# Altium PCB 01DriverOccure&SignalDetect.PcbDoc (part 2 of 3)
Units mil, origin at the board's own origin, x right, y up, seen from the top; angles counter-clockwise.
Board outline 5526.23 x 3781.16 mil, 2 copper layers (Top Layer, Bottom Layer); 144 components, 81 nets, 385 pads, 179 vias.
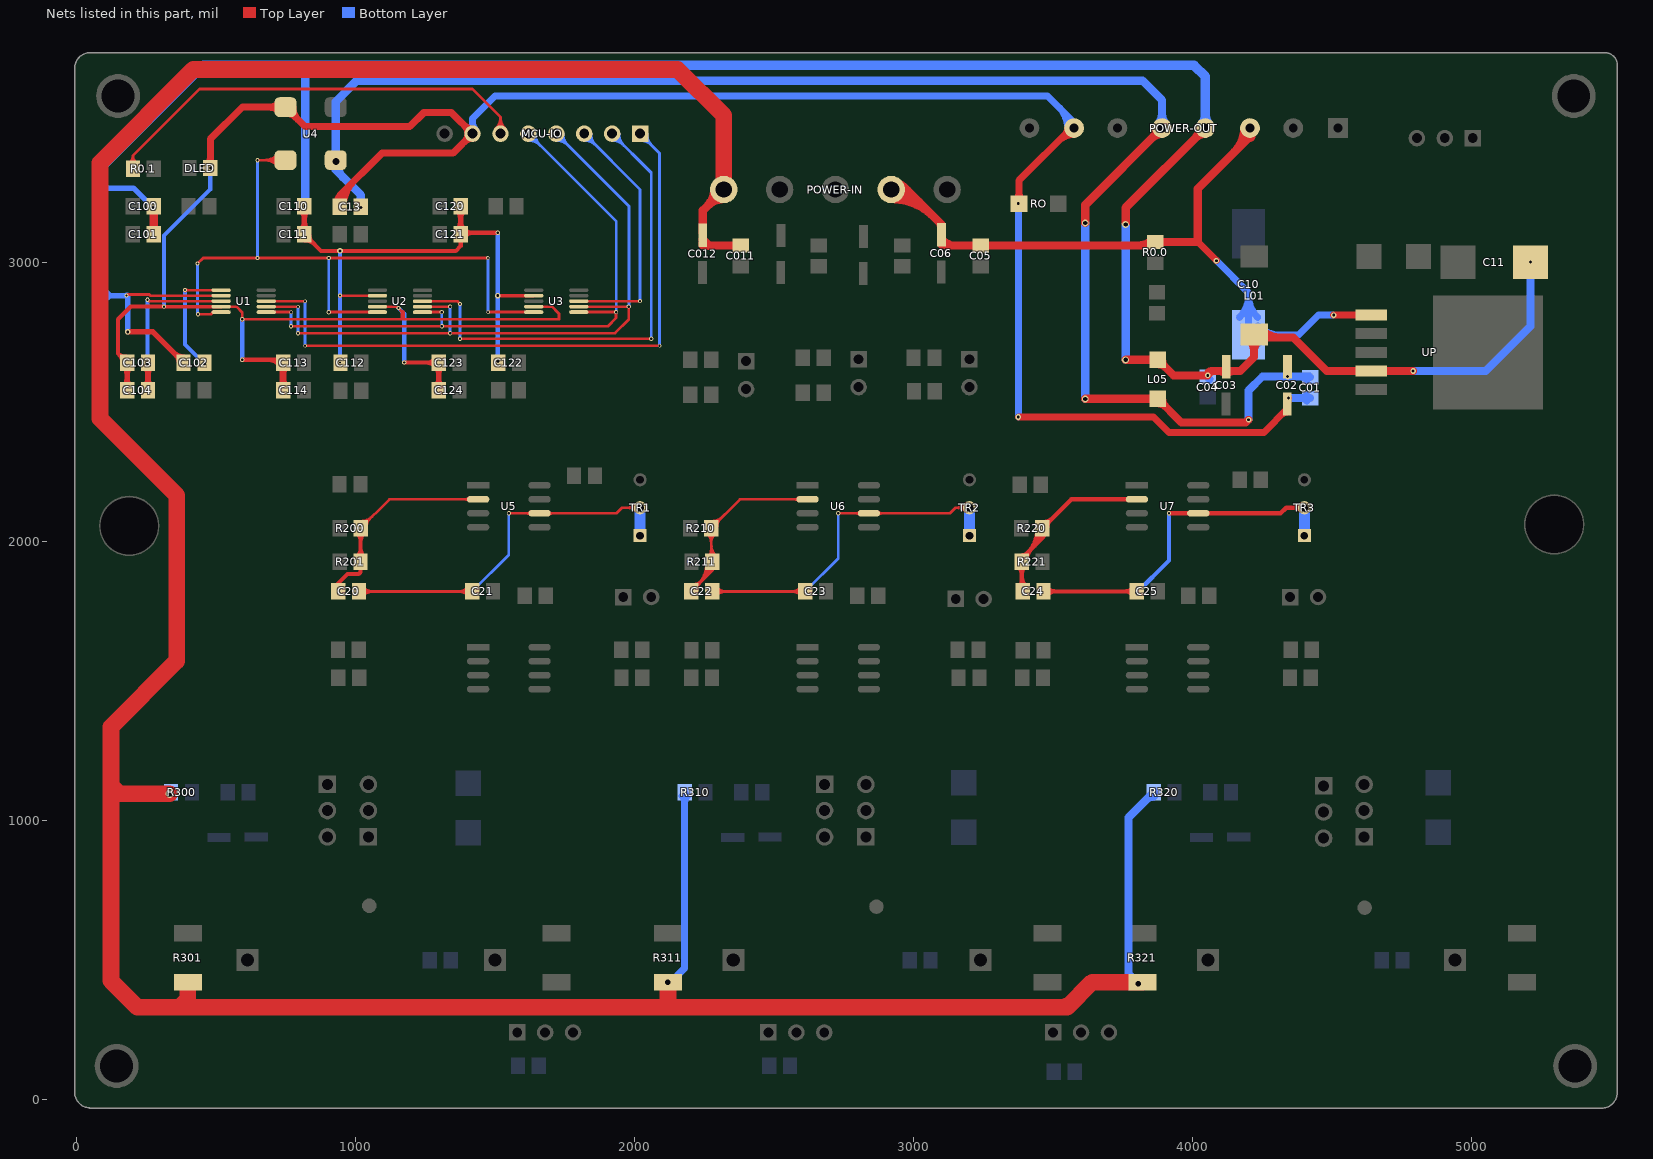
[diagram p2: the nets of this part, all layers, seen from the top]

## Via types
v1: diameter 15, hole 8, Top Layer to Bottom Layer, 110 vias
v2: diameter 20, hole 10, Top Layer to Bottom Layer, 51 vias
v3: diameter 12, hole 8, Top Layer to Bottom Layer, 7 vias
v4: diameter 25, hole 15, Top Layer to Bottom Layer, 5 vias
v5: diameter 30, hole 20, Top Layer to Bottom Layer, 3 vias
v6: diameter 35, hole 25, Top Layer to Bottom Layer, 3 vias

## Nets (pads, with @x,y where several pads share a name; then routed paths per layer and width w, separated by ;. In a path a pad name is that pad's centre, name@x,y a point inside that pad or via, vN(x,y) a via of type N, cw(c..) or ccw(c..) an arc to the next point about the centre after c; other vN are vias at no path point) (continued)
AVDD3.3: C03.1 C04.1 C11.1 C100.1 C101.1 C102.2 C110.1 C111.1 C112.2 C120.1 C121.1 C122.2 L01.1 L05.1 POWER-OUT.4 U1.2 U2.2 U3.2 UP.4 | length 14366
  Top Layer w10: v1@180,2879.69 183.81,2883.5 262.66,2883.5 266.48,2879.69 U1.2@519.29,2879.69 ; v1@945.31,2879.69 U2.2@1079.29,2879.69
  Top Layer w13: v2@1510.31,2879.69 U3.2@1639.29,2879.69
  Top Layer w15: C111.1@817.4,3100 877.4,3040 v2(945,3040) 1360,3040 1377.4,3057.4 C121.1@1377.4,3100 1382.4,3105 v1(1510,3105) ; v1(945,2880) v1@945.31,2879.69 ; v2(1510,2880) v2@1510.31,2879.69 ; C111.1@817.4,3077.97 cw(c817.4,3024.79) 855.01,3062.4 ; C111.1@817.4,3077.97 cw(c817.4,3024.79) 855.01,3062.4 ; C111.1@817.4,3077.97 cw(c817.4,3024.79) 855.01,3062.4 ; C111.1@835.49,3096.06 ccw(c869.66,3096.06) 845.5,3071.9 ; C111.1@835.49,3096.06 ccw(c869.66,3096.06) 845.5,3071.9 ; C111.1@835.49,3096.06 ccw(c869.66,3096.06) 845.5,3071.9 ; C121.1@1390.19,3091.15 cw(c1423.64,3057.7) 1423.64,3105 ; C121.1@1390.19,3091.15 cw(c1423.64,3057.7) 1423.64,3105 ; C121.1@1390.19,3091.15 cw(c1423.64,3057.7) 1423.64,3105 ; C121.1@1390.19,3116.73 ccw(c1418.51,3145.05) 1418.51,3105 ; C121.1@1390.19,3116.73 ccw(c1418.51,3145.05) 1418.51,3105 ; C121.1@1390.19,3116.73 ccw(c1418.51,3145.05) 1418.51,3105
  Top Layer w20: v2(185,2750) 274.6,2750 C102.2@384.6,2640 ; C111.1@817.4,3100 C110.1@817.4,3200 ; C121.1@1377.4,3100 C120.1@1377.4,3200 ; 351.26,2673.34 ccw(c384.6,2706.67) C102.2@384.6,2659.53 ; 351.26,2673.34 ccw(c384.6,2706.67) C102.2@384.6,2659.53 ; 351.26,2673.34 ccw(c384.6,2706.67) C102.2@384.6,2659.53 ; C102.2@360.77,2663.83 cw(c340.87,2643.94) C102.2@369.01,2643.94 ; C102.2@360.77,2663.83 cw(c340.87,2643.94) C102.2@369.01,2643.94 ; C102.2@360.77,2663.83 cw(c340.87,2643.94) C102.2@369.01,2643.94 ; C111.1@806.38,3114.96 ccw(c779.76,3141.58) 817.4,3141.58 ; C111.1@806.38,3114.96 ccw(c779.76,3141.58) 817.4,3141.58 ; C111.1@806.38,3114.96 ccw(c779.76,3141.58) 817.4,3141.58 ; C110.1@806.38,3185.04 cw(c779.76,3158.42) 817.4,3158.42 ; C110.1@806.38,3185.04 cw(c779.76,3158.42) 817.4,3158.42 ; C110.1@806.38,3185.04 cw(c779.76,3158.42) 817.4,3158.42 ; 817.4,3141.58 ccw(c855.04,3141.58) C111.1@828.43,3114.96 ; 817.4,3141.58 ccw(c855.04,3141.58) C111.1@828.43,3114.96 ; 817.4,3141.58 ccw(c855.04,3141.58) C111.1@828.43,3114.96 ; 817.4,3158.42 cw(c855.04,3158.42) C110.1@828.43,3185.04 ; 817.4,3158.42 cw(c855.04,3158.42) C110.1@828.43,3185.04 ; 817.4,3158.42 cw(c855.04,3158.42) C110.1@828.43,3185.04 ; C121.1@1366.38,3114.96 ccw(c1339.76,3141.58) 1377.4,3141.58 ; C121.1@1366.38,3114.96 ccw(c1339.76,3141.58) 1377.4,3141.58 ; C121.1@1366.38,3114.96 ccw(c1339.76,3141.58) 1377.4,3141.58 ; C120.1@1366.38,3185.04 cw(c1339.76,3158.42) 1377.4,3158.42 ; C120.1@1366.38,3185.04 cw(c1339.76,3158.42) 1377.4,3158.42 ; C120.1@1366.38,3185.04 cw(c1339.76,3158.42) 1377.4,3158.42 ; 1377.4,3141.58 ccw(c1415.04,3141.58) C121.1@1388.43,3114.96 ; 1377.4,3141.58 ccw(c1415.04,3141.58) C121.1@1388.43,3114.96 ; 1377.4,3141.58 ccw(c1415.04,3141.58) C121.1@1388.43,3114.96 ; 1377.4,3158.42 cw(c1415.04,3158.42) C120.1@1388.43,3185.04 ; 1377.4,3158.42 cw(c1415.04,3158.42) C120.1@1388.43,3185.04 ; 1377.4,3158.42 cw(c1415.04,3158.42) C120.1@1388.43,3185.04
  Top Layer w27.87: L05.1@3875,2650 3931,2594 v2(4054,2594) 4070,2610 ; v2(4789.65,2609.65) UP.4@4639.79,2609.65 4480.35,2609.65 4360,2730 4230,2730 L01.1@4220,2740 4220,2660 4170,2610 4120,2610 4070,2610 ; L05.1@3875,2633.94 cw(c3875,2595.16) L05.1@3902.42,2622.58 ; L05.1@3875,2633.94 cw(c3875,2595.16) L05.1@3902.42,2622.58 ; L05.1@3875,2633.94 cw(c3875,2595.16) L05.1@3902.42,2622.58 ; L05.1@3891.06,2650 ccw(c3929.84,2650) L05.1@3902.42,2622.58 ; L05.1@3891.06,2650 ccw(c3929.84,2650) L05.1@3902.42,2622.58 ; L05.1@3891.06,2650 ccw(c3929.84,2650) L05.1@3902.42,2622.58 ; v2@4050.21,2595.08 cw(c4070,2589.42) 4070,2610 ; v2@4050.21,2595.08 cw(c4070,2589.42) 4070,2610 ; v2@4050.21,2595.08 cw(c4070,2589.42) 4070,2610 ; v2@4051.22,2596.78 cw(c4083.12,2564.88) 4083.12,2610 ; v2@4051.22,2596.78 cw(c4083.12,2564.88) 4083.12,2610 ; v2@4051.22,2596.78 cw(c4083.12,2564.88) 4083.12,2610 ; L01.1@4202.02,2722.02 cw(c4158.6,2678.6) 4220,2678.6 ; L01.1@4202.02,2722.02 cw(c4158.6,2678.6) 4220,2678.6 ; L01.1@4202.02,2722.02 cw(c4158.6,2678.6) 4220,2678.6 ; 4220,2678.6 cw(c4281.4,2678.6) L01.1@4237.98,2722.02 ; 4220,2678.6 cw(c4281.4,2678.6) L01.1@4237.98,2722.02 ; 4220,2678.6 cw(c4281.4,2678.6) L01.1@4237.98,2722.02 ; L01.1@4247.83,2757.98 ccw(c4315.39,2825.54) 4315.39,2730 ; L01.1@4247.83,2757.98 ccw(c4315.39,2825.54) 4315.39,2730 ; L01.1@4247.83,2757.98 ccw(c4315.39,2825.54) 4315.39,2730 ; 4090.06,2610 cw(c4090.06,2569.47) 4118.72,2598.13 ccw(c4090.06,2569.47) 4090.06,2610 ; C03.1@4121.28,2598.13 cw(c4149.94,2569.47) 4149.94,2610 ccw(c4149.94,2569.47) C03.1@4121.28,2598.13
  Top Layer w30: C101.1@277.4,3100 C100.1@277.4,3200 ; v4(3760,2650) L05.1@3875,2650 ; v4@3760,3140 3760,3195 POWER-OUT.4@4045,3480 ; 3838.79,2650 ccw(c3838.79,2686.21) L05.1@3864.39,2660.61 ; 3838.79,2650 cw(c3838.79,2613.79) L05.1@3864.39,2639.39 ; 3838.79,2650 ccw(c3838.79,2686.21) L05.1@3864.39,2660.61 ; 3838.79,2650 cw(c3838.79,2613.79) L05.1@3864.39,2639.39 ; 3838.79,2650 ccw(c3838.79,2686.21) L05.1@3864.39,2660.61 ; 3838.79,2650 cw(c3838.79,2613.79) L05.1@3864.39,2639.39 ; 4010.12,3445.12 ccw(c3975.24,3480) POWER-OUT.4@4024.57,3480 ; 4010.12,3445.12 cw(c4045,3410.24) POWER-OUT.4@4045,3459.57 ; 4010.12,3445.12 ccw(c3975.24,3480) POWER-OUT.4@4024.57,3480 ; 4010.12,3445.12 cw(c4045,3410.24) POWER-OUT.4@4045,3459.57 ; 4010.12,3445.12 ccw(c3975.24,3480) POWER-OUT.4@4024.57,3480 ; 4010.12,3445.12 cw(c4045,3410.24) POWER-OUT.4@4045,3459.57
  Bottom Layer w15: v1(945,2640) v1(945,2880) v2(945,3040) ; v1(1510,3105) v2(1510,2880) 1510,2645 v2(1511.6,2643.4) ; 1510,2653.3 ccw(c1521.49,2653.3) v2@1513.37,2645.17 ; 1510,2653.3 ccw(c1521.49,2653.3) v2@1513.37,2645.17 ; 1510,2653.3 ccw(c1521.49,2653.3) v2@1513.37,2645.17
  Bottom Layer w20: 80,3255 90,3265 205,3265 v2(275,3195) ; 110,2880 v1(180,2880) 185,2875 v2(185,2750) ; v1@181.77,2881.77 cw(c173.96,2873.96) 185,2873.96 ; v1@181.77,2881.77 cw(c173.96,2873.96) 185,2873.96 ; v1@181.77,2881.77 cw(c173.96,2873.96) 185,2873.96
  Bottom Layer w27.87: C04.1@4054,2589.4 4054,2586 C04.1@4060,2580 ; v2(4789.65,2609.65) 5049.65,2609.65 5210,2770 v2(5210,3000)
  Bottom Layer w30: v2(820,3200) 820,3685 840,3705 ; v4(3760,2650) v4(3760,3135)
  Bottom Layer w35: 110,2880 80,2910 80,3255 80,3330 455,3705 840,3705 4005,3705 4045,3665 POWER-OUT.4@4045,3480 ; POWER-OUT.4@4032.32,3492.68 ccw(c4001.71,3523.29) 4045,3523.29 ; POWER-OUT.4@4032.32,3492.68 ccw(c4001.71,3523.29) 4045,3523.29 ; POWER-OUT.4@4032.32,3492.68 ccw(c4001.71,3523.29) 4045,3523.29 ; 4045,3523.29 ccw(c4088.29,3523.29) POWER-OUT.4@4057.68,3492.68 ; 4045,3523.29 ccw(c4088.29,3523.29) POWER-OUT.4@4057.68,3492.68 ; 4045,3523.29 ccw(c4088.29,3523.29) POWER-OUT.4@4057.68,3492.68
AVDD5.0: C05.1 C06.1 C10.1 POWER-IN.4 POWER-OUT.3 R0.0.2 UP.1 | length 5424.1
  Top Layer w25: 4018.2,3071.8 v2(4085,3005) ; v2(4505,2810) 4505.43,2810.43 UP.1@4639.79,2810.43
  Top Layer w30: POWER-IN.4@2920,3260 2975,3260 ; C06.1@3100.03,3062.57 3117.21,3063.3 ; 3117.15,3064.72 cw(c3117.26,3062.26) 3119,3064 3100,3083 3100,3135 2975,3260 ; POWER-OUT.3@4205,3450 4018.2,3263.2 4018.2,3071.8 R0.0.2@3866,3071.8 3853.6,3059.4 C05.1@3240,3059.4 3123.6,3059.4 ; 2975,3260 ccw(c2975,3232.9) 2950.69,3244.88 cw(c2975,3232.9) 2975,3260 ; 2975,3260 cw(c2975,3287.1) 2950.69,3275.12 ccw(c2975,3287.1) 2975,3260 ; 3123.6,3059.4 cw(c3123.6,3085.77) 3100.65,3072.78 ccw(c3123.6,3085.77) 3123.6,3059.4 ; 3806.55,3059.4 ccw(c3806.55,3127.31) R0.0.2@3854.57,3079.29 ; 3806.55,3059.4 ccw(c3806.55,3127.31) R0.0.2@3854.57,3079.29 ; 3806.55,3059.4 ccw(c3806.55,3127.31) R0.0.2@3854.57,3079.29 ; 4148.91,3393.91 ccw(c4062.81,3480) POWER-OUT.3@4184.57,3480 ; 4148.91,3393.91 ccw(c4062.81,3480) POWER-OUT.3@4184.57,3480 ; 4148.91,3393.91 ccw(c4062.81,3480) POWER-OUT.3@4184.57,3480 ; POWER-IN.4@2920,3225.79 cw(c2920,3010.41) 3072.3,3162.7 ccw(c2920,3010.41) POWER-IN.4@2920,3225.79 ; POWER-IN.4@2920,3255.79 cw(c2920,3112.84) 3021.08,3213.92 ccw(c2920,3112.84) POWER-IN.4@2920,3255.79 ; POWER-IN.4@2920,3285.79 cw(c2920,3215.26) 2969.87,3265.13 ccw(c2920,3215.26) POWER-IN.4@2920,3285.79 ; POWER-IN.4@2922.79,3256.84 cw(c2950.42,3225.56) 2979.93,3255.07 ccw(c2950.42,3225.56) POWER-IN.4@2922.79,3256.84 ; POWER-IN.4@2942.65,3234.36 cw(c2971.59,3201.59) 3002.5,3232.5 ccw(c2971.59,3201.59) POWER-IN.4@2942.65,3234.36 ; 3090.66,3144.34 cw(c3069.9,3123.59) 3099.25,3123.59 ccw(c3069.9,3123.59) 3090.66,3144.34 ; C06.1@3100,3071.66 cw(c3100,3044.29) 3119.36,3063.64 ccw(c3100,3044.29) C06.1@3100,3071.66 ; C06.1@3100.51,3072.96 ccw(c3124.43,3099.03) 3125.95,3063.68 cw(c3124.43,3099.03) C06.1@3100.51,3072.96 ; C06.1@3100.53,3072.94 ccw(c3133.21,3105.62) 3133.21,3059.4 cw(c3133.21,3105.62) C06.1@3100.53,3072.94
  Top Layer w40: POWER-OUT.3@4205,3450 POWER-OUT.3@4205,3480
  Bottom Layer w25: v2(4085,3005) 4200,2890 C10.1@4200,2738.9 4378.9,2738.9 4450,2810 v2(4505,2810) ; C10.1@4167.08,2801.35 ccw(c4087.61,2880.82) 4200,2880.82 ; C10.1@4167.08,2801.35 ccw(c4087.61,2880.82) 4200,2880.82 ; C10.1@4167.08,2801.35 ccw(c4087.61,2880.82) 4200,2880.82 ; 4200,2880.82 ccw(c4312.39,2880.82) C10.1@4232.92,2801.35 ; 4200,2880.82 ccw(c4312.39,2880.82) C10.1@4232.92,2801.35 ; 4200,2880.82 ccw(c4312.39,2880.82) C10.1@4232.92,2801.35 ; C10.1@4232.92,2705.98 cw(c4312.39,2626.5) 4312.39,2738.9 ; C10.1@4232.92,2705.98 cw(c4312.39,2626.5) 4312.39,2738.9 ; C10.1@4232.92,2705.98 cw(c4312.39,2626.5) 4312.39,2738.9 ; C10.1@4232.92,2771.82 ccw(c4312.39,2851.29) 4312.39,2738.9 ; C10.1@4232.92,2771.82 ccw(c4312.39,2851.29) 4312.39,2738.9 ; C10.1@4232.92,2771.82 ccw(c4312.39,2851.29) 4312.39,2738.9
DGND: C01.2 C02.2 C13.2 C103.2 C104.2 C113.2 C114.2 C123.2 C124.2 DLED.2 MCU-IO.7 POWER-OUT.7 RO.2 U1.4 U2.4 U3.4 U4.2 | length 14047.4
  Top Layer w10: U1.4@519.29,2840.32 574.68,2840.32 595,2820 v1(595,2795) ; v1@595,2790 v1(595,2795) ; U2.4@1079.29,2840.32 1149.68,2840.32 1170,2820 ; U3.4@1639.29,2840.32 1704.68,2840.32 1725,2820 1730,2815 1730,2795 v1(595,2795)
  Top Layer w13: v1(315,2840.32) U1.4@519.29,2840.32
  Top Layer w15: C103.2@182.6,2640 150,2672.6 150,2795 195.32,2840.32 v1(315,2840.32) ; v1(595,2650) 731.6,2650 C113.2@741.6,2640 ; 1170,2800 1170,2820 ; v1(1175,2640) C123.2@1298.6,2640 ; 151.97,2670.63 ccw(c174.38,2693.04) C103.2@179.61,2661.78 ; 151.97,2670.63 ccw(c174.38,2693.04) C103.2@179.61,2661.78 ; 151.97,2670.63 ccw(c174.38,2693.04) C103.2@179.61,2661.78 ; 154.5,2668.1 cw(c130.34,2643.94) C103.2@164.51,2643.94 ; 154.5,2668.1 cw(c130.34,2643.94) C103.2@164.51,2643.94 ; 154.5,2668.1 cw(c130.34,2643.94) C103.2@164.51,2643.94 ; 683.29,2650 cw(c683.29,2585.63) C113.2@728.81,2631.15 ; 683.29,2650 cw(c683.29,2585.63) C113.2@728.81,2631.15 ; 683.29,2650 cw(c683.29,2585.63) C113.2@728.81,2631.15 ; 712.56,2650 ccw(c712.56,2672.97) C113.2@728.81,2656.73 ; 712.56,2650 ccw(c712.56,2672.97) C113.2@728.81,2656.73 ; 712.56,2650 ccw(c712.56,2672.97) C113.2@728.81,2656.73 ; 1254.92,2640 ccw(c1254.92,2683.67) C123.2@1285.81,2652.79 ; 1254.92,2640 cw(c1254.92,2596.33) C123.2@1285.81,2627.21 ; 1254.92,2640 ccw(c1254.92,2683.67) C123.2@1285.81,2652.79 ; 1254.92,2640 cw(c1254.92,2596.33) C123.2@1285.81,2627.21 ; 1254.92,2640 ccw(c1254.92,2683.67) C123.2@1285.81,2652.79 ; 1254.92,2640 cw(c1254.92,2596.33) C123.2@1285.81,2627.21
  Top Layer w20: C104.2@182.6,2540 C103.2@182.6,2640 ; C124.2@1298.6,2540 C123.2@1298.6,2640 ; C104.2@171.57,2554.96 ccw(c144.96,2581.58) 182.6,2581.58 ; C104.2@171.57,2554.96 ccw(c144.96,2581.58) 182.6,2581.58 ; C104.2@171.57,2554.96 ccw(c144.96,2581.58) 182.6,2581.58 ; C103.2@171.57,2625.04 cw(c144.96,2598.42) 182.6,2598.42 ; C103.2@171.57,2625.04 cw(c144.96,2598.42) 182.6,2598.42 ; C103.2@171.57,2625.04 cw(c144.96,2598.42) 182.6,2598.42 ; 182.6,2581.58 ccw(c220.24,2581.58) C104.2@193.62,2554.96 ; 182.6,2581.58 ccw(c220.24,2581.58) C104.2@193.62,2554.96 ; 182.6,2581.58 ccw(c220.24,2581.58) C104.2@193.62,2554.96 ; 182.6,2598.42 cw(c220.24,2598.42) C103.2@193.62,2625.04 ; 182.6,2598.42 cw(c220.24,2598.42) C103.2@193.62,2625.04 ; 182.6,2598.42 cw(c220.24,2598.42) C103.2@193.62,2625.04 ; C124.2@1287.57,2554.96 ccw(c1260.96,2581.58) 1298.6,2581.58 ; C124.2@1287.57,2554.96 ccw(c1260.96,2581.58) 1298.6,2581.58 ; C124.2@1287.57,2554.96 ccw(c1260.96,2581.58) 1298.6,2581.58 ; C123.2@1287.57,2625.04 cw(c1260.96,2598.42) 1298.6,2598.42 ; C123.2@1287.57,2625.04 cw(c1260.96,2598.42) 1298.6,2598.42 ; C123.2@1287.57,2625.04 cw(c1260.96,2598.42) 1298.6,2598.42 ; 1298.6,2581.58 ccw(c1336.24,2581.58) C124.2@1309.62,2554.96 ; 1298.6,2581.58 ccw(c1336.24,2581.58) C124.2@1309.62,2554.96 ; 1298.6,2581.58 ccw(c1336.24,2581.58) C124.2@1309.62,2554.96 ; 1298.6,2598.42 cw(c1336.24,2598.42) C123.2@1309.62,2625.04 ; 1298.6,2598.42 cw(c1336.24,2598.42) C123.2@1309.62,2625.04 ; 1298.6,2598.42 cw(c1336.24,2598.42) C123.2@1309.62,2625.04
  Top Layer w25: DLED.2@480.4,3337 480.4,3440.4 595.09,3555.09 U4.2@749.81,3555.09 819.91,3485 1195,3485 1245,3535 1345,3535 MCU-IO.7@1420,3460 1350,3390 1095,3390 944.6,3239.6 C13.2@944.6,3198 ; C114.2@741.6,2540 C113.2@741.6,2640 ; v2(3375,2445) 3860,2445 3915,2390 3945,2390 4255,2390 4340,2475 C02.2@4340,2500 ; RO.2@3378,3209 3378,3293 3565,3480 POWER-OUT.7@3575,3480 ; C02.2@4330.7,2465.7 ccw(c4316.08,2480.32) C02.2@4336.75,2480.32 ; DLED.2@471.15,3350.19 ccw(c448.8,3372.54) 480.4,3372.54 ; DLED.2@471.15,3350.19 ccw(c448.8,3372.54) 480.4,3372.54 ; DLED.2@471.15,3350.19 ccw(c448.8,3372.54) 480.4,3372.54 ; 480.4,3372.54 ccw(c512.01,3372.54) DLED.2@489.66,3350.19 ; 480.4,3372.54 ccw(c512.01,3372.54) DLED.2@489.66,3350.19 ; 480.4,3372.54 ccw(c512.01,3372.54) DLED.2@489.66,3350.19 ; 690.51,3555.09 ccw(c690.51,3610.46) U4.2@729.66,3571.31 ; 690.51,3555.09 cw(c690.51,3499.73) U4.2@729.66,3538.88 ; 690.51,3555.09 ccw(c690.51,3610.46) U4.2@729.66,3571.31 ; 690.51,3555.09 cw(c690.51,3499.73) U4.2@729.66,3538.88 ; 690.51,3555.09 ccw(c690.51,3610.46) U4.2@729.66,3571.31 ; 690.51,3555.09 cw(c690.51,3499.73) U4.2@729.66,3538.88 ; C114.2@732.34,2553.19 ccw(c709.99,2575.54) 741.6,2575.54 ; C114.2@732.34,2553.19 ccw(c709.99,2575.54) 741.6,2575.54 ; C114.2@732.34,2553.19 ccw(c709.99,2575.54) 741.6,2575.54 ; C113.2@732.34,2626.81 cw(c709.99,2604.46) 741.6,2604.46 ; C113.2@732.34,2626.81 cw(c709.99,2604.46) 741.6,2604.46 ; C113.2@732.34,2626.81 cw(c709.99,2604.46) 741.6,2604.46 ; 741.6,2575.54 ccw(c773.2,2575.54) C114.2@750.85,2553.19 ; 741.6,2575.54 ccw(c773.2,2575.54) C114.2@750.85,2553.19 ; 741.6,2575.54 ccw(c773.2,2575.54) C114.2@750.85,2553.19 ; 741.6,2604.46 cw(c773.2,2604.46) C113.2@750.85,2626.81 ; 741.6,2604.46 cw(c773.2,2604.46) C113.2@750.85,2626.81 ; 741.6,2604.46 cw(c773.2,2604.46) C113.2@750.85,2626.81 ; C13.2@932.69,3201.94 cw(c994.86,3201.94) 950.9,3245.9 ; C13.2@932.69,3201.94 cw(c994.86,3201.94) 950.9,3245.9 ; C13.2@932.69,3201.94 cw(c994.86,3201.94) 950.9,3245.9 ; C13.2@935.34,3211.19 ccw(c912.99,3233.54) 944.6,3233.54 ; C13.2@935.34,3211.19 ccw(c912.99,3233.54) 944.6,3233.54 ; C13.2@935.34,3211.19 ccw(c912.99,3233.54) 944.6,3233.54 ; 944.6,3233.54 ccw(c976.2,3233.54) C13.2@953.85,3211.19 ; 944.6,3233.54 ccw(c976.2,3233.54) C13.2@953.85,3211.19 ; 944.6,3233.54 ccw(c976.2,3233.54) C13.2@953.85,3211.19 ; C13.2@957.69,3201.94 cw(c1080.21,3201.94) 993.58,3288.58 ; C13.2@957.69,3201.94 cw(c1080.21,3201.94) 993.58,3288.58 ; C13.2@957.69,3201.94 cw(c1080.21,3201.94) 993.58,3288.58 ; 1390.93,3430.93 ccw(c1361.86,3460) MCU-IO.7@1402.97,3460 ; 1390.93,3430.93 cw(c1420,3401.86) MCU-IO.7@1420,3442.97 ; 1390.93,3430.93 ccw(c1361.86,3460) MCU-IO.7@1402.97,3460 ; 1390.93,3430.93 cw(c1420,3401.86) MCU-IO.7@1420,3442.97 ; 1390.93,3430.93 ccw(c1361.86,3460) MCU-IO.7@1402.97,3460 ; 1390.93,3430.93 cw(c1420,3401.86) MCU-IO.7@1420,3442.97 ; 1390.93,3489.07 ccw(c1420,3518.14) 1420,3477.03 cw(c1420,3518.14) 1390.93,3489.07 ; 1390.93,3489.07 cw(c1361.86,3460) MCU-IO.7@1402.97,3460 ; 1390.93,3489.07 cw(c1361.86,3460) MCU-IO.7@1402.97,3460 ; RO.2@3365.63,3221.37 ccw(c3335.75,3251.25) 3378,3251.25 ; RO.2@3365.63,3221.37 ccw(c3335.75,3251.25) 3378,3251.25 ; RO.2@3365.63,3221.37 ccw(c3335.75,3251.25) 3378,3251.25 ; 3378,3251.25 ccw(c3420.25,3251.25) RO.2@3390.37,3221.37 ; 3378,3251.25 ccw(c3420.25,3251.25) RO.2@3390.37,3221.37 ; 3378,3251.25 ccw(c3420.25,3251.25) RO.2@3390.37,3221.37 ; 3518.78,3433.78 cw(c3575,3377.56) POWER-OUT.7@3575,3457.07 ; 3518.78,3433.78 cw(c3575,3377.56) POWER-OUT.7@3575,3457.07 ; 3518.78,3433.78 cw(c3575,3377.56) POWER-OUT.7@3575,3457.07 ; 3542.92,3457.92 ccw(c3520.84,3480) POWER-OUT.7@3552.07,3480 ; 3542.92,3457.92 ccw(c3520.84,3480) POWER-OUT.7@3552.07,3480 ; 3542.92,3457.92 ccw(c3520.84,3480) POWER-OUT.7@3552.07,3480 ; U4.2@753.75,3532.16 cw(c753.75,3486.3) 786.18,3518.73 ccw(c753.75,3486.3) U4.2@753.75,3532.16 ; U4.2@776.68,3555.09 ccw(c841.55,3555.09) 795.68,3509.22 cw(c841.55,3555.09) U4.2@776.68,3555.09 ; 4320.5,2455.5 cw(c4339,2436.99) 4339,2463.16 ccw(c4339,2436.99) 4320.5,2455.5
  Top Layer w27.87: C02.2@4340,2500 4340,2510 v2(4342.6,2512.6)
  Bottom Layer w15: v1(315,2840.32) 315,3095 480,3260 v1(480,3336.6) ; v1(595,2650) v1(595,2795) ; v1(1155,2835) 1175,2815 v1(1175,2640)
  Bottom Layer w25: MCU-IO.7@1420,3460 1420,3515 1500,3595 3480,3595 3575,3500 POWER-OUT.7@3575,3480 ; v2(3375,2445) v2(3375,3210) ; MCU-IO.7@1407.96,3472.04 ccw(c1378.89,3501.11) 1420,3501.11 ; MCU-IO.7@1407.96,3472.04 ccw(c1378.89,3501.11) 1420,3501.11 ; MCU-IO.7@1407.96,3472.04 ccw(c1378.89,3501.11) 1420,3501.11 ; 1420,3501.11 ccw(c1461.11,3501.11) MCU-IO.7@1432.04,3472.04 ; 1420,3501.11 ccw(c1461.11,3501.11) MCU-IO.7@1432.04,3472.04 ; 1420,3501.11 ccw(c1461.11,3501.11) MCU-IO.7@1432.04,3472.04 ; 3521.71,3553.29 cw(c3448.42,3480) POWER-OUT.7@3552.07,3480 ; 3521.71,3553.29 cw(c3448.42,3480) POWER-OUT.7@3552.07,3480 ; 3521.71,3553.29 cw(c3448.42,3480) POWER-OUT.7@3552.07,3480
  Bottom Layer w27.87: v2(4342.6,2512.6) C01.2@4421,2512.6 ; 4388.93,2512.6 ccw(c4388.93,2540.73) C01.2@4408.82,2520.84 ; 4388.93,2512.6 cw(c4388.93,2484.46) C01.2@4408.82,2504.36 ; 4388.93,2512.6 ccw(c4388.93,2540.73) C01.2@4408.82,2520.84 ; 4388.93,2512.6 cw(c4388.93,2484.46) C01.2@4408.82,2504.36 ; 4388.93,2512.6 ccw(c4388.93,2540.73) C01.2@4408.82,2520.84 ; 4388.93,2512.6 cw(c4388.93,2484.46) C01.2@4408.82,2504.36
DVDD3.3: C01.1 C02.1 C13.1 L05.2 POWER-OUT.5 U4.4 | length 6689
  Top Layer w27.87: L05.2@3875,2510 3960,2425 4190,2425 v2(4200,2435) ; L05.2@3875,2493.94 cw(c3875,2455.16) L05.2@3902.42,2482.58 ; L05.2@3875,2493.94 cw(c3875,2455.16) L05.2@3902.42,2482.58 ; L05.2@3875,2493.94 cw(c3875,2455.16) L05.2@3902.42,2482.58 ; L05.2@3891.06,2510 ccw(c3929.84,2510) L05.2@3902.42,2482.58 ; L05.2@3891.06,2510 ccw(c3929.84,2510) L05.2@3902.42,2482.58 ; L05.2@3891.06,2510 ccw(c3929.84,2510) L05.2@3902.42,2482.58
  Top Layer w30: v6(930,3360) U4.4@930,3364.91 ; v4(3615,2510) L05.2@3875,2510 ; v4(3615,3140) 3615,3205 POWER-OUT.5@3890,3480 ; 3838.79,2510 ccw(c3838.79,2546.21) L05.2@3864.39,2520.61 ; 3838.79,2510 cw(c3838.79,2473.79) L05.2@3864.39,2499.39 ; 3838.79,2510 ccw(c3838.79,2546.21) L05.2@3864.39,2520.61 ; 3838.79,2510 cw(c3838.79,2473.79) L05.2@3864.39,2499.39 ; 3838.79,2510 ccw(c3838.79,2546.21) L05.2@3864.39,2520.61 ; 3838.79,2510 cw(c3838.79,2473.79) L05.2@3864.39,2499.39 ; 3855.12,3445.12 ccw(c3820.24,3480) POWER-OUT.5@3869.57,3480 ; 3855.12,3445.12 cw(c3890,3410.24) POWER-OUT.5@3890,3459.57 ; 3855.12,3445.12 ccw(c3820.24,3480) POWER-OUT.5@3869.57,3480 ; 3855.12,3445.12 cw(c3890,3410.24) POWER-OUT.5@3890,3459.57 ; 3855.12,3445.12 ccw(c3820.24,3480) POWER-OUT.5@3869.57,3480 ; 3855.12,3445.12 cw(c3890,3410.24) POWER-OUT.5@3890,3459.57
  Bottom Layer w27.87: v2(4200,2435) 4200,2540 4250.4,2590.4 4339.6,2590.4 v2(4340,2590) 4418.4,2590 C01.1@4421,2587.4 ; 4382.66,2590 cw(c4382.66,2553) C01.1@4408.82,2579.16 ; 4382.66,2590 cw(c4382.66,2553) C01.1@4408.82,2579.16 ; 4382.66,2590 cw(c4382.66,2553) C01.1@4408.82,2579.16
  Bottom Layer w30: v2(1020,3195) 1020,3240 930,3330 v6(930,3360) 930,3575 1005,3650 3820,3650 3890,3580 POWER-OUT.5@3890,3480 ; v4(3615,2510) v4(3615,3140) ; v6@932.5,3360 ccw(c1010.96,3360) 955.48,3304.52 ; v6@932.5,3360 ccw(c1010.96,3360) 955.48,3304.52 ; v6@932.5,3360 ccw(c1010.96,3360) 955.48,3304.52 ; POWER-OUT.5@3875.55,3494.45 ccw(c3840.67,3529.33) 3890,3529.33 ; POWER-OUT.5@3875.55,3494.45 ccw(c3840.67,3529.33) 3890,3529.33 ; POWER-OUT.5@3875.55,3494.45 ccw(c3840.67,3529.33) 3890,3529.33 ; 3890,3529.33 ccw(c3939.33,3529.33) POWER-OUT.5@3904.45,3494.45 ; 3890,3529.33 ccw(c3939.33,3529.33) POWER-OUT.5@3904.45,3494.45 ; 3890,3529.33 ccw(c3939.33,3529.33) POWER-OUT.5@3904.45,3494.45
IN_+15V: C011.1 C012.1 POWER-IN.1 R300.1 R301.1 R310.1 R311.1 R320.1 R321.1 | length 12590.2
  Top Layer w30: C012.1@2245,3081 2266.6,3059.4 ; C012.1@2245,3105 2245,3185 POWER-IN.1@2320,3260 ; C012.1@2245.08,3060.57 cw(c2249.3,3022.42) 2264.1,3057.84 ; C011.1@2380,3059.4 2266.6,3059.4 ; v5(3805,415) R321.1@3815,415 ; 2261.6,3201.6 ccw(c2203.19,3260) 2285.79,3260 cw(c2203.19,3260) 2261.6,3201.6 ; 2261.6,3201.6 cw(c2320,3143.19) 2320,3225.79 ccw(c2320,3143.19) 2261.6,3201.6 ; 2266.6,3059.4 cw(c2266.6,3084.37) 2245.63,3070.82 ccw(c2266.6,3084.37) 2266.6,3059.4 ; C012.1@2245,3069.66 cw(c2245,3042.29) 2264.36,3061.64 ccw(c2245,3042.29) C012.1@2245,3069.66 ; C012.1@2245.53,3070.94 ccw(c2273.38,3098.79) 2273.38,3059.4 cw(c2273.38,3098.79) C012.1@2245.53,3070.94
  Top Layer w60: v5(335,1095) 155,1095 125,1125 ; R301.1@420,420 R301.1@400,420 400,360 370,330 ; v5(2120,420) 2120,330 ; POWER-IN.1@2320,3260 2320,3525 2155,3690 419.24,3690 85,3355.76 85,2440 360,2165 360,1570 125,1335 125,1125 ; 3550,335 3545,330 ; R321.1@3820,420 3640,420 3550,330 3545,330 ; 125,1125 125,425 220,330 370,330 ; 370,330 2120,330 ; 2120,330 3545,330
  Bottom Layer w25: v5(2120,420) 2125,415 2180,470 R310.1@2180,1100 ; v5@2120,422.5 ccw(c2120,452.68) 2141.34,431.34 ; v5@2120,422.5 ccw(c2120,452.68) 2141.34,431.34 ; v5@2120,422.5 ccw(c2120,452.68) 2141.34,431.34 ; R310.1@2170.74,1086.81 cw(c2148.4,1064.46) 2180,1064.46 ; R310.1@2170.74,1086.81 cw(c2148.4,1064.46) 2180,1064.46 ; R310.1@2170.74,1086.81 cw(c2148.4,1064.46) 2180,1064.46 ; 2180,1064.46 cw(c2211.6,1064.46) R310.1@2189.26,1086.81 ; 2180,1064.46 cw(c2211.6,1064.46) R310.1@2189.26,1086.81 ; 2180,1064.46 cw(c2211.6,1064.46) R310.1@2189.26,1086.81
  Bottom Layer w30: v5(3805,415) 3770,450 3770,1010 R320.1@3860,1100 ; R320.1@3835.2,1075.2 cw(c3860,1050.4) R320.1@3860,1085.47 ; R320.1@3835.2,1075.2 cw(c3860,1050.4) R320.1@3860,1085.47 ; R320.1@3835.2,1075.2 cw(c3860,1050.4) R320.1@3860,1085.47
IN_CLK: MCU-IO.4 U1.7 U2.7 U3.7 | length 3005
  Top Layer w10: U1.7@680.71,2840.32 v3@794.68,2840.32 ; v1(795,2745) 795.32,2745.32 v1(1339.68,2745.32) 1914.68,2745.32 ; U2.7@1240.71,2840.32 v1(1339.68,2840.32) ; U3.7@1800.71,2840.32 v1(1979.68,2840.32) 1979.68,2794.68 1930.32,2745.32 1914.68,2745.32 ; 1915,2745 1914.68,2745.32
  Bottom Layer w10: v1(795,2745) v3(795,2840) ; v1(1339.68,2745.32) v1(1339.68,2840.32) ; MCU-IO.4@1720,3460 1980,3200 v1@1980,2840.32 ; MCU-IO.4@1720,3435.47 cw(c1720,3376.26) 1761.87,3418.13 ; MCU-IO.4@1720,3435.47 cw(c1720,3376.26) 1761.87,3418.13 ; MCU-IO.4@1720,3435.47 cw(c1720,3376.26) 1761.87,3418.13 ; MCU-IO.4@1720,3445.47 cw(c1720,3410.4) 1744.8,3435.2 ; MCU-IO.4@1720,3445.47 cw(c1720,3410.4) 1744.8,3435.2 ; MCU-IO.4@1720,3445.47 cw(c1720,3410.4) 1744.8,3435.2 ; MCU-IO.4@1734.53,3460 ccw(c1769.6,3460) 1744.8,3435.2 ; MCU-IO.4@1734.53,3460 ccw(c1769.6,3460) 1744.8,3435.2 ; MCU-IO.4@1734.53,3460 ccw(c1769.6,3460) 1744.8,3435.2 ; MCU-IO.4@1744.53,3460 ccw(c1803.74,3460) 1761.87,3418.13 ; MCU-IO.4@1744.53,3460 ccw(c1803.74,3460) 1761.87,3418.13 ; MCU-IO.4@1744.53,3460 ccw(c1803.74,3460) 1761.87,3418.13
IN_CS1: MCU-IO.1 U1.8 | length 2802.6
  Top Layer w10: U1.8@680.71,2860 v3(820,2860) ; v3(820,2700) v3(2090,2700)
  Bottom Layer w10: v3(820,2700) v3(820,2860) ; MCU-IO.1@2020,3460 2090,3390 v3(2090,2700) ; MCU-IO.1@2020,3435.47 cw(c2020,3376.26) 2061.87,3418.13 ; MCU-IO.1@2020,3435.47 cw(c2020,3376.26) 2061.87,3418.13 ; MCU-IO.1@2020,3435.47 cw(c2020,3376.26) 2061.87,3418.13 ; MCU-IO.1@2020,3445.47 cw(c2020,3410.4) MCU-IO.1@2044.8,3435.2 ; MCU-IO.1@2020,3445.47 cw(c2020,3410.4) MCU-IO.1@2044.8,3435.2 ; MCU-IO.1@2020,3445.47 cw(c2020,3410.4) MCU-IO.1@2044.8,3435.2 ; MCU-IO.1@2034.53,3460 ccw(c2069.6,3460) MCU-IO.1@2044.8,3435.2 ; MCU-IO.1@2034.53,3460 ccw(c2069.6,3460) MCU-IO.1@2044.8,3435.2 ; MCU-IO.1@2034.53,3460 ccw(c2069.6,3460) MCU-IO.1@2044.8,3435.2 ; MCU-IO.1@2044.53,3460 ccw(c2103.74,3460) 2061.87,3418.13 ; MCU-IO.1@2044.53,3460 ccw(c2103.74,3460) 2061.87,3418.13 ; MCU-IO.1@2044.53,3460 ccw(c2103.74,3460) 2061.87,3418.13
IN_CS2: MCU-IO.2 U2.8 | length 2185.7
  Top Layer w10: U2.8@1240.71,2860 1365,2860 v1(1375,2850) ; v1(1375,2725) v1(2060,2725)
  Bottom Layer w10: v1(1375,2725) v1(1375,2850) ; MCU-IO.2@1920,3460 2060,3320 v1(2060,2725) ; MCU-IO.2@1920,3435.47 cw(c1920,3376.26) 1961.87,3418.13 ; MCU-IO.2@1920,3435.47 cw(c1920,3376.26) 1961.87,3418.13 ; MCU-IO.2@1920,3435.47 cw(c1920,3376.26) 1961.87,3418.13 ; MCU-IO.2@1920,3445.47 cw(c1920,3410.4) 1944.8,3435.2 ; MCU-IO.2@1920,3445.47 cw(c1920,3410.4) 1944.8,3435.2 ; MCU-IO.2@1920,3445.47 cw(c1920,3410.4) 1944.8,3435.2 ; MCU-IO.2@1934.53,3460 ccw(c1969.6,3460) 1944.8,3435.2 ; MCU-IO.2@1934.53,3460 ccw(c1969.6,3460) 1944.8,3435.2 ; MCU-IO.2@1934.53,3460 ccw(c1969.6,3460) 1944.8,3435.2 ; MCU-IO.2@1944.53,3460 ccw(c2003.74,3460) 1961.87,3418.13 ; MCU-IO.2@1944.53,3460 ccw(c2003.74,3460) 1961.87,3418.13 ; MCU-IO.2@1944.53,3460 ccw(c2003.74,3460) 1961.87,3418.13
IN_CS3: MCU-IO.3 U3.8 | length 1346.5
  Top Layer w10: U3.8@1800.71,2860 v1(2020,2860)
  Bottom Layer w10: MCU-IO.3@1820,3460 2020,3260 v1(2020,2860) ; MCU-IO.3@1820,3435.47 cw(c1820,3376.26) 1861.87,3418.13 ; MCU-IO.3@1820,3435.47 cw(c1820,3376.26) 1861.87,3418.13 ; MCU-IO.3@1820,3435.47 cw(c1820,3376.26) 1861.87,3418.13 ; MCU-IO.3@1820,3445.47 cw(c1820,3410.4) 1844.8,3435.2 ; MCU-IO.3@1820,3445.47 cw(c1820,3410.4) 1844.8,3435.2 ; MCU-IO.3@1820,3445.47 cw(c1820,3410.4) 1844.8,3435.2 ; MCU-IO.3@1834.53,3460 ccw(c1869.6,3460) 1844.8,3435.2 ; MCU-IO.3@1834.53,3460 ccw(c1869.6,3460) 1844.8,3435.2 ; MCU-IO.3@1834.53,3460 ccw(c1869.6,3460) 1844.8,3435.2 ; MCU-IO.3@1844.53,3460 ccw(c1903.74,3460) 1861.87,3418.13 ; MCU-IO.3@1844.53,3460 ccw(c1903.74,3460) 1861.87,3418.13 ; MCU-IO.3@1844.53,3460 ccw(c1903.74,3460) 1861.87,3418.13
IN_IOLED: MCU-IO.6 R0.1.2 | length 2200.9
  Top Layer w10: R0.1.2@203.2,3334 203.2,3381.8 ; MCU-IO.6@1520,3460 1520,3520 1420,3620 441.39,3620 203.2,3381.8 ; R0.1.2@190.04,3353.78 ccw(c166.77,3381.8) 203.2,3381.8 ; R0.1.2@190.04,3353.78 ccw(c166.77,3381.8) 203.2,3381.8 ; R0.1.2@190.04,3353.78 ccw(c166.77,3381.8) 203.2,3381.8 ; 203.2,3381.8 ccw(c239.63,3381.8) R0.1.2@216.35,3353.78 ; 203.2,3381.8 ccw(c239.63,3381.8) R0.1.2@216.35,3353.78 ; 203.2,3381.8 ccw(c239.63,3381.8) R0.1.2@216.35,3353.78 ; MCU-IO.6@1502.66,3477.34 ccw(c1460.79,3519.21) 1520,3519.21 ; MCU-IO.6@1502.66,3477.34 ccw(c1460.79,3519.21) 1520,3519.21 ; MCU-IO.6@1502.66,3477.34 ccw(c1460.79,3519.21) 1520,3519.21 ; MCU-IO.6@1509.73,3470.27 ccw(c1484.93,3495.07) 1520,3495.07 ; MCU-IO.6@1509.73,3470.27 ccw(c1484.93,3495.07) 1520,3495.07 ; MCU-IO.6@1509.73,3470.27 ccw(c1484.93,3495.07) 1520,3495.07 ; 1520,3495.07 ccw(c1555.07,3495.07) MCU-IO.6@1530.27,3470.27 ; 1520,3495.07 ccw(c1555.07,3495.07) MCU-IO.6@1530.27,3470.27 ; 1520,3495.07 ccw(c1555.07,3495.07) MCU-IO.6@1530.27,3470.27 ; 1520,3519.21 ccw(c1579.21,3519.21) MCU-IO.6@1537.34,3477.34 ; 1520,3519.21 ccw(c1579.21,3519.21) MCU-IO.6@1537.34,3477.34 ; 1520,3519.21 ccw(c1579.21,3519.21) MCU-IO.6@1537.34,3477.34
IN_SIMO: MCU-IO.5 U1.6 U2.6 U3.6 | length 2844.6
  Top Layer w10: U1.6@680.71,2820.63 v3(770.63,2820.63) ; v1(770,2770) v1(1310,2770) 1905,2770 1934.37,2799.37 v1(1934.37,2820.63) U3.6@1800.71,2820.63 ; U2.6@1240.71,2820.63 v1(1309.37,2820.63)
  Bottom Layer w10: v1(770,2770) 770,2820 v3(770.63,2820.63) ; v1(1309.37,2820.63) 1309.37,2770.63 v1(1310,2770) ; MCU-IO.5@1620,3460 1935,3145 v1@1935,2820.63 ; 1309.37,2777.56 ccw(c1317.56,2777.56) v1@1311.77,2771.77 ; 1309.37,2777.56 ccw(c1317.56,2777.56) v1@1311.77,2771.77 ; 1309.37,2777.56 ccw(c1317.56,2777.56) v1@1311.77,2771.77 ; MCU-IO.5@1620,3435.47 cw(c1620,3376.26) 1661.87,3418.13 ; MCU-IO.5@1620,3435.47 cw(c1620,3376.26) 1661.87,3418.13 ; MCU-IO.5@1620,3435.47 cw(c1620,3376.26) 1661.87,3418.13 ; MCU-IO.5@1620,3445.47 cw(c1620,3410.4) 1644.8,3435.2 ; MCU-IO.5@1620,3445.47 cw(c1620,3410.4) 1644.8,3435.2 ; MCU-IO.5@1620,3445.47 cw(c1620,3410.4) 1644.8,3435.2 ; MCU-IO.5@1634.53,3460 ccw(c1669.6,3460) 1644.8,3435.2 ; MCU-IO.5@1634.53,3460 ccw(c1669.6,3460) 1644.8,3435.2 ; MCU-IO.5@1634.53,3460 ccw(c1669.6,3460) 1644.8,3435.2 ; MCU-IO.5@1644.53,3460 ccw(c1703.74,3460) 1661.87,3418.13 ; MCU-IO.5@1644.53,3460 ccw(c1703.74,3460) 1661.87,3418.13 ; MCU-IO.5@1644.53,3460 ccw(c1703.74,3460) 1661.87,3418.13 ; v1@1932.6,2822.4 ccw(c1926.81,2828.19) 1935,2828.19 ; v1@1932.6,2822.4 ccw(c1926.81,2828.19) 1935,2828.19 ; v1@1932.6,2822.4 ccw(c1926.81,2828.19) 1935,2828.19
MCLK: U1.5 U2.5 U3.5 U4.3 | length 3094.5
  Top Layer w10: v1(435,2995) 455,3015 v1(650,3015) v1(905,3015) v3(1475,3015) ; v1@436.77,2815.51 v1(436.77,2813.23) 483.23,2813.23 490.63,2820.63 U1.5@519.29,2820.63 ; v1(650,3365) U4.3@749.72,3365 ; v1(905,2820) 905.63,2820.63 U2.5@1079.29,2820.63 ; v3(1475.63,2820.63) U3.5@1639.29,2820.63 ; 672.18,3365 ccw(c672.18,3438.79) U4.3@724.36,3386.61 ; 672.18,3365 ccw(c672.18,3438.79) U4.3@724.36,3386.61 ; 672.18,3365 ccw(c672.18,3438.79) U4.3@724.36,3386.61 ; 672.63,3365 cw(c672.63,3291.85) U4.3@724.36,3343.57 ; 672.63,3365 cw(c672.63,3291.85) U4.3@724.36,3343.57 ; 672.63,3365 cw(c672.63,3291.85) U4.3@724.36,3343.57 ; 696.32,3365 ccw(c696.32,3414.65) U4.3@731.43,3379.54 ; 696.32,3365 ccw(c696.32,3414.65) U4.3@731.43,3379.54 ; 696.32,3365 ccw(c696.32,3414.65) U4.3@731.43,3379.54 ; 696.77,3365 cw(c696.77,3315.99) U4.3@731.43,3350.65 ; 696.77,3365 cw(c696.77,3315.99) U4.3@731.43,3350.65 ; 696.77,3365 cw(c696.77,3315.99) U4.3@731.43,3350.65 ; U4.3@749.72,3365 U4.3@749.81,3365.09 U4.3@749.72,3365 ; v1@906.77,2818.23 cw(c912.56,2812.44) 912.56,2820.63 ; v1@906.77,2818.23 cw(c912.56,2812.44) 912.56,2820.63 ; v1@906.77,2818.23 cw(c912.56,2812.44) 912.56,2820.63
  Bottom Layer w10: v1(435,2995) 435,2815 v1(436.77,2813.23) ; v1(650,3015) v1(650,3365) ; v1(905,2820) v1(905,3015) ; v3(1475,3015) 1475,2995 1475.63,2994.37 v3(1475.63,2820.63)
NetC20_1: C20.1 C21.2 TR1.1 TR1.2 U5.6 | length 2157.5
  Top Layer w10: C20.1@1013.4,1820 v1(1418.6,1820) ; v1(1550,2100) U5.6@1660,2100 1935,2100 1955,2120 TR1.2@2020,2120 ; C20.1@1027.96,1805.44 cw(c1063.11,1770.29) 1063.11,1820 ; C20.1@1027.96,1805.44 cw(c1063.11,1770.29) 1063.11,1820 ; C20.1@1027.96,1805.44 cw(c1063.11,1770.29) 1063.11,1820 ; C20.1@1027.96,1834.56 ccw(c1063.11,1869.71) 1063.11,1820 ; C20.1@1027.96,1834.56 ccw(c1063.11,1869.71) 1063.11,1820 ; C20.1@1027.96,1834.56 ccw(c1063.11,1869.71) 1063.11,1820 ; 1368.89,1820 ccw(c1368.89,1869.71) C21.2@1404.04,1834.56 ; 1368.89,1820 cw(c1368.89,1770.29) C21.2@1404.04,1805.44 ; 1368.89,1820 ccw(c1368.89,1869.71) C21.2@1404.04,1834.56 ; 1368.89,1820 cw(c1368.89,1770.29) C21.2@1404.04,1805.44 ; 1368.89,1820 ccw(c1368.89,1869.71) C21.2@1404.04,1834.56 ; 1368.89,1820 cw(c1368.89,1770.29) C21.2@1404.04,1805.44 ; 1615.1,2100 ccw(c1615.1,2116.9) U5.6@1627.05,2104.95 ; 1615.1,2100 cw(c1615.1,2083.1) U5.6@1627.05,2095.05 ; 1615.1,2100 ccw(c1615.1,2116.9) U5.6@1627.05,2104.95 ; 1615.1,2100 cw(c1615.1,2083.1) U5.6@1627.05,2095.05 ; 1615.1,2100 ccw(c1615.1,2116.9) U5.6@1627.05,2104.95 ; 1615.1,2100 cw(c1615.1,2083.1) U5.6@1627.05,2095.05 ; U5.6@1692.95,2095.05 cw(c1704.9,2083.1) 1704.9,2100 ; U5.6@1692.95,2095.05 cw(c1704.9,2083.1) 1704.9,2100 ; U5.6@1692.95,2095.05 cw(c1704.9,2083.1) 1704.9,2100 ; U5.6@1692.95,2104.95 ccw(c1704.9,2116.9) 1704.9,2100 ; U5.6@1692.95,2104.95 ccw(c1704.9,2116.9) 1704.9,2100 ; U5.6@1692.95,2104.95 ccw(c1704.9,2116.9) 1704.9,2100 ; 1975.04,2120 ccw(c1975.04,2164.96) TR1.2@2006.83,2133.17 ; 1975.04,2120 cw(c1975.04,2075.04) TR1.2@2006.83,2106.83 ; 1975.04,2120 ccw(c1975.04,2164.96) TR1.2@2006.83,2133.17 ; 1975.04,2120 cw(c1975.04,2075.04) TR1.2@2006.83,2106.83 ; 1975.04,2120 ccw(c1975.04,2164.96) TR1.2@2006.83,2133.17 ; 1975.04,2120 cw(c1975.04,2075.04) TR1.2@2006.83,2106.83
  Bottom Layer w10: v1(1418.6,1820) 1550,1951.4 v1(1550,2100)
  Bottom Layer w39.37: TR1.1@2020,2020 TR1.2@2020,2120
NetC20_2: C20.2 R200.1 R201.2 U5.2 | length 1555.5
  Top Layer w10: R200.1@1019,2047 1122,2150 U5.2@1440,2150 ; R200.1@1019,2061.53 ccw(c1019,2096.6) R200.1@1043.8,2071.8 ; R200.1@1019,2061.53 ccw(c1019,2096.6) R200.1@1043.8,2071.8 ; R200.1@1019,2061.53 ccw(c1019,2096.6) R200.1@1043.8,2071.8 ; R200.1@1019,2071.53 ccw(c1019,2130.74) 1060.87,2088.87 ; R200.1@1019,2071.53 ccw(c1019,2130.74) 1060.87,2088.87 ; R200.1@1019,2071.53 ccw(c1019,2130.74) 1060.87,2088.87 ; R200.1@1039.59,2050.94 cw(c1079.8,2050.94) 1051.37,2079.37 ; R200.1@1039.59,2050.94 cw(c1079.8,2050.94) 1051.37,2079.37 ; R200.1@1039.59,2050.94 cw(c1079.8,2050.94) 1051.37,2079.37 ; 1395.1,2150 ccw(c1395.1,2166.9) U5.2@1407.05,2154.95 ; 1395.1,2150 cw(c1395.1,2133.1) U5.2@1407.05,2145.05 ; 1395.1,2150 ccw(c1395.1,2166.9) U5.2@1407.05,2154.95 ; 1395.1,2150 cw(c1395.1,2133.1) U5.2@1407.05,2145.05 ; 1395.1,2150 ccw(c1395.1,2166.9) U5.2@1407.05,2154.95 ; 1395.1,2150 cw(c1395.1,2133.1) U5.2@1407.05,2145.05
  Top Layer w15: C20.2@938.6,1820 938.6,1848.6 971.97,1881.97 1011.97,1881.97 1018.8,1888.8 R201.2@1018.8,1927 1019,1927.2 R200.1@1019,2047 ; R201.2@1006.01,1943.73 ccw(c974.66,1975.08) 1019,1975.08 ; R201.2@1006.01,1943.73 ccw(c974.66,1975.08) 1019,1975.08 ; R201.2@1006.01,1943.73 ccw(c974.66,1975.08) 1019,1975.08 ; R200.1@1006.21,2030.27 cw(c975.33,1999.39) 1019,1999.39 ; R200.1@1006.21,2030.27 cw(c975.33,1999.39) 1019,1999.39 ; R200.1@1006.21,2030.27 cw(c975.33,1999.39) 1019,1999.39 ; 1019,1974.14 ccw(c1062.01,1974.14) R201.2@1031.6,1943.73 ; 1019,1974.14 ccw(c1062.01,1974.14) R201.2@1031.6,1943.73 ; 1019,1974.14 ccw(c1062.01,1974.14) R201.2@1031.6,1943.73 ; 1019,1999.39 cw(c1062.67,1999.39) R200.1@1031.79,2030.27 ; 1019,1999.39 cw(c1062.67,1999.39) R200.1@1031.79,2030.27 ; 1019,1999.39 cw(c1062.67,1999.39) R200.1@1031.79,2030.27
NetC22_1: C22.1 C23.2 TR2.1 TR2.2 U6.6 | length 2079.9
  Top Layer w10: C22.1@2278.62,1820 v1(2611.6,1820) ; v1(2730,2100) U6.6@2840,2100 3130,2100 3150,2120 TR2.2@3200,2120 ; C22.1@2293.18,1805.44 cw(c2328.33,1770.29) 2328.33,1820 ; C22.1@2293.18,1805.44 cw(c2328.33,1770.29) 2328.33,1820 ; C22.1@2293.18,1805.44 cw(c2328.33,1770.29) 2328.33,1820 ; C22.1@2293.18,1834.56 ccw(c2328.33,1869.71) 2328.33,1820 ; C22.1@2293.18,1834.56 ccw(c2328.33,1869.71) 2328.33,1820 ; C22.1@2293.18,1834.56 ccw(c2328.33,1869.71) 2328.33,1820 ; 2561.89,1820 ccw(c2561.89,1869.71) C23.2@2597.04,1834.56 ; 2561.89,1820 cw(c2561.89,1770.29) C23.2@2597.04,1805.44 ; 2561.89,1820 ccw(c2561.89,1869.71) C23.2@2597.04,1834.56 ; 2561.89,1820 cw(c2561.89,1770.29) C23.2@2597.04,1805.44 ; 2561.89,1820 ccw(c2561.89,1869.71) C23.2@2597.04,1834.56 ; 2561.89,1820 cw(c2561.89,1770.29) C23.2@2597.04,1805.44 ; 2795.1,2100 ccw(c2795.1,2116.9) U6.6@2807.05,2104.95 ; 2795.1,2100 cw(c2795.1,2083.1) U6.6@2807.05,2095.05 ; 2795.1,2100 ccw(c2795.1,2116.9) U6.6@2807.05,2104.95 ; 2795.1,2100 cw(c2795.1,2083.1) U6.6@2807.05,2095.05 ; 2795.1,2100 ccw(c2795.1,2116.9) U6.6@2807.05,2104.95 ; 2795.1,2100 cw(c2795.1,2083.1) U6.6@2807.05,2095.05 ; U6.6@2872.95,2095.05 cw(c2884.9,2083.1) 2884.9,2100 ; U6.6@2872.95,2095.05 cw(c2884.9,2083.1) 2884.9,2100 ; U6.6@2872.95,2095.05 cw(c2884.9,2083.1) 2884.9,2100 ; U6.6@2872.95,2104.95 ccw(c2884.9,2116.9) 2884.9,2100 ; U6.6@2872.95,2104.95 ccw(c2884.9,2116.9) 2884.9,2100 ; U6.6@2872.95,2104.95 ccw(c2884.9,2116.9) 2884.9,2100 ; 3155.04,2120 ccw(c3155.04,2164.96) TR2.2@3186.83,2133.17 ; 3155.04,2120 cw(c3155.04,2075.04) TR2.2@3186.83,2106.83 ; 3155.04,2120 ccw(c3155.04,2164.96) TR2.2@3186.83,2133.17 ; 3155.04,2120 cw(c3155.04,2075.04) TR2.2@3186.83,2106.83 ; 3155.04,2120 ccw(c3155.04,2164.96) TR2.2@3186.83,2133.17 ; 3155.04,2120 cw(c3155.04,2075.04) TR2.2@3186.83,2106.83
  Bottom Layer w10: v1(2611.6,1820) 2730,1938.4 v1(2730,2100)
  Bottom Layer w39.37: TR2.1@3200,2020 TR2.2@3200,2120
NetC22_2: C22.2 R210.1 R211.2 U6.2 | length 2721.8
  Top Layer w10: C22.2@2203.81,1820 2278.8,1894.99 ; U6.2@2620,2150 2378,2150 R210.1@2275,2047 2275,1929.8 R211.2@2278.8,1926 2278.8,1894.99 ; C22.2@2203.81,1834.53 ccw(c2203.81,1869.6) C22.2@2228.61,1844.8 ; C22.2@2203.81,1834.53 ccw(c2203.81,1869.6) C22.2@2228.61,1844.8 ; C22.2@2203.81,1834.53 ccw(c2203.81,1869.6) C22.2@2228.61,1844.8 ; C22.2@2203.81,1844.53 ccw(c2203.81,1903.74) 2245.69,1861.87 ; C22.2@2203.81,1844.53 ccw(c2203.81,1903.74) 2245.69,1861.87 ; C22.2@2203.81,1844.53 ccw(c2203.81,1903.74) 2245.69,1861.87 ; C22.2@2224.4,1823.94 cw(c2264.61,1823.94) 2236.18,1852.37 ; C22.2@2224.4,1823.94 cw(c2264.61,1823.94) 2236.18,1852.37 ; C22.2@2224.4,1823.94 cw(c2264.61,1823.94) 2236.18,1852.37 ; C22.2@2224.51,1840.7 ccw(c2143.14,1922.06) R211.2@2258.21,1922.06 ; C22.2@2224.51,1840.7 ccw(c2143.14,1922.06) R211.2@2258.21,1922.06 ; C22.2@2224.51,1840.7 ccw(c2143.14,1922.06) R211.2@2258.21,1922.06 ; 2241.58,1857.77 ccw(c2177.29,1922.06) R211.2@2268.21,1922.06 ; 2241.58,1857.77 ccw(c2177.29,1922.06) R211.2@2268.21,1922.06 ; 2241.58,1857.77 ccw(c2177.29,1922.06) R211.2@2268.21,1922.06 ; 2258.65,1874.84 ccw(c2211.43,1922.06) R211.2@2278.21,1922.06 ; 2258.65,1874.84 ccw(c2211.43,1922.06) R211.2@2278.21,1922.06 ; 2258.65,1874.84 ccw(c2211.43,1922.06) R211.2@2278.21,1922.06 ; R210.1@2260.44,2028.5 cw(c2225.29,1993.35) 2275,1993.35 ; R210.1@2260.44,2028.5 cw(c2225.29,1993.35) 2275,1993.35 ; R210.1@2260.44,2028.5 cw(c2225.29,1993.35) 2275,1993.35 ; R211.2@2264.24,1944.5 ccw(c2238.28,1970.46) 2275,1970.46 ; R211.2@2264.24,1944.5 ccw(c2238.28,1970.46) 2275,1970.46 ; R211.2@2264.24,1944.5 ccw(c2238.28,1970.46) 2275,1970.46 ; R211.2@2273.31,1902.22 cw(c2271.3,1894.99) 2278.8,1894.99 ; R211.2@2273.31,1902.22 cw(c2271.3,1894.99) 2278.8,1894.99 ; R211.2@2273.31,1902.22 cw(c2271.3,1894.99) 2278.8,1894.99 ; 2275,1964.69 ccw(c2313.56,1964.69) R211.2@2286.29,1937.43 ; 2275,1964.69 ccw(c2313.56,1964.69) R211.2@2286.29,1937.43 ; 2275,1964.69 ccw(c2313.56,1964.69) R211.2@2286.29,1937.43 ; 2275,1988.83 ccw(c2337.7,1988.83) R211.2@2293.36,1944.5 ; 2275,1988.83 ccw(c2337.7,1988.83) R211.2@2293.36,1944.5 ; 2275,1988.83 ccw(c2337.7,1988.83) R211.2@2293.36,1944.5 ; 2275,1993.35 cw(c2324.71,1993.35) R210.1@2289.56,2028.5 ; 2275,1993.35 cw(c2324.71,1993.35) R210.1@2289.56,2028.5 ; 2275,1993.35 cw(c2324.71,1993.35) R210.1@2289.56,2028.5 ; R210.1@2275,2061.53 ccw(c2275,2096.6) R210.1@2299.8,2071.8 ; R210.1@2275,2061.53 ccw(c2275,2096.6) R210.1@2299.8,2071.8 ; R210.1@2275,2061.53 ccw(c2275,2096.6) R210.1@2299.8,2071.8 ; R210.1@2275,2071.53 ccw(c2275,2130.74) 2316.87,2088.87 ; R210.1@2275,2071.53 ccw(c2275,2130.74) 2316.87,2088.87 ; R210.1@2275,2071.53 ccw(c2275,2130.74) 2316.87,2088.87 ; 2275.72,1891.91 ccw(c2245.57,1922.06) R211.2@2288.21,1922.06 ; 2275.72,1891.91 ccw(c2245.57,1922.06) R211.2@2288.21,1922.06 ; 2275.72,1891.91 ccw(c2245.57,1922.06) R211.2@2288.21,1922.06 ; 2278.8,1894.99 cw(c2286.31,1894.99) R211.2@2284.3,1902.22 ; 2278.8,1894.99 cw(c2286.31,1894.99) R211.2@2284.3,1902.22 ; 2278.8,1894.99 cw(c2286.31,1894.99) R211.2@2284.3,1902.22 ; R210.1@2295.59,2050.94 cw(c2335.8,2050.94) 2307.37,2079.37 ; R210.1@2295.59,2050.94 cw(c2335.8,2050.94) 2307.37,2079.37 ; R210.1@2295.59,2050.94 cw(c2335.8,2050.94) 2307.37,2079.37 ; 2575.1,2150 ccw(c2575.1,2166.9) U6.2@2587.05,2154.95 ; 2575.1,2150 cw(c2575.1,2133.1) U6.2@2587.05,2145.05 ; 2575.1,2150 ccw(c2575.1,2166.9) U6.2@2587.05,2154.95 ; 2575.1,2150 cw(c2575.1,2133.1) U6.2@2587.05,2145.05 ; 2575.1,2150 ccw(c2575.1,2166.9) U6.2@2587.05,2154.95 ; 2575.1,2150 cw(c2575.1,2133.1) U6.2@2587.05,2145.05
NetC24_1: C24.1 C25.2 TR3.1 TR3.2 U7.6 | length 1896.3
  Top Layer w15: C24.1@3465.62,1820 C25.2@3799.6,1820 v1(3799.6,1815.4) ; v1(3915,2100) U7.6@4020,2100 4315,2100 4335,2120 TR3.2@4400,2120 ; C24.1@3478.41,1807.21 cw(c3509.29,1776.33) 3509.29,1820 ; C24.1@3478.41,1807.21 cw(c3509.29,1776.33) 3509.29,1820 ; C24.1@3478.41,1807.21 cw(c3509.29,1776.33) 3509.29,1820 ; C24.1@3478.41,1832.79 ccw(c3509.29,1863.67) 3509.29,1820 ; C24.1@3478.41,1832.79 ccw(c3509.29,1863.67) 3509.29,1820 ; C24.1@3478.41,1832.79 ccw(c3509.29,1863.67) 3509.29,1820 ; 3755.92,1820 ccw(c3755.92,1863.67) C25.2@3786.81,1832.79 ; 3755.92,1820 cw(c3755.92,1776.33) C25.2@3786.81,1807.21 ; 3755.92,1820 ccw(c3755.92,1863.67) C25.2@3786.81,1832.79 ; 3755.92,1820 cw(c3755.92,1776.33) C25.2@3786.81,1807.21 ; 3755.92,1820 ccw(c3755.92,1863.67) C25.2@3786.81,1832.79 ; 3755.92,1820 cw(c3755.92,1776.33) C25.2@3786.81,1807.21 ; C25.2@3788.5,1820 cw(c3788.5,1804.3) v1(3799.6,1815.4) ; C25.2@3788.5,1820 cw(c3788.5,1804.3) v1(3799.6,1815.4) ; C25.2@3788.5,1820 cw(c3788.5,1804.3) v1(3799.6,1815.4) ; 4361.08,2120 ccw(c4361.08,2158.92) TR3.2@4388.6,2131.4 ; 4361.08,2120 cw(c4361.08,2081.08) TR3.2@4388.6,2108.6 ; 4361.08,2120 ccw(c4361.08,2158.92) TR3.2@4388.6,2131.4 ; 4361.08,2120 cw(c4361.08,2081.08) TR3.2@4388.6,2108.6 ; 4361.08,2120 ccw(c4361.08,2158.92) TR3.2@4388.6,2131.4 ; 4361.08,2120 cw(c4361.08,2081.08) TR3.2@4388.6,2108.6
  Bottom Layer w15: v1(3799.6,1815.4) 3915,1930.8 v1(3915,2100)
  Bottom Layer w39.37: TR3.1@4400,2020 TR3.2@4400,2120
NetC24_2: C24.2 R220.1 R221.2 U7.2 | length 2020.5
  Top Layer w15: C24.2@3390.81,1820 3387.2,1823.62 R221.2@3387.2,1927 3387.2,1937.2 3461,2011 ; U7.2@3800,2150 3565,2150 R220.1@3461,2046 3461,2011 ; 3387.2,1879.39 ccw(c3343.52,1879.39) 3374.4,1910.27 cw(c3343.52,1879.39) 3387.2,1879.39 ; 3387.2,1879.39 cw(c3430.87,1879.39) 3399.99,1910.27 ccw(c3430.87,1879.39) 3387.2,1879.39 ; R221.2@3387.2,1949.03 ccw(c3387.2,1977.59) 3407.39,1957.39 ; R221.2@3387.2,1949.03 ccw(c3387.2,1977.59) 3407.39,1957.39 ; R221.2@3387.2,1949.03 ccw(c3387.2,1977.59) 3407.39,1957.39 ; R221.2@3405.29,1930.94 cw(c3464.07,1930.94) 3422.5,1972.5 ; R221.2@3405.29,1930.94 cw(c3464.07,1930.94) 3422.5,1972.5 ; R221.2@3405.29,1930.94 cw(c3464.07,1930.94) 3422.5,1972.5 ; 3408.15,1958.15 ccw(c3324.24,2042.06) R220.1@3442.91,2042.06 ; 3408.15,1958.15 ccw(c3324.24,2042.06) R220.1@3442.91,2042.06 ; 3408.15,1958.15 ccw(c3324.24,2042.06) R220.1@3442.91,2042.06 ; 3433.76,1983.76 ccw(c3375.46,2042.06) R220.1@3457.91,2042.06 ; 3433.76,1983.76 ccw(c3375.46,2042.06) R220.1@3457.91,2042.06 ; 3433.76,1983.76 ccw(c3375.46,2042.06) R220.1@3457.91,2042.06 ; R220.1@3452.07,2026.33 cw(c3443.38,2011) 3461,2011 ; R220.1@3452.07,2026.33 cw(c3443.38,2011) 3461,2011 ; R220.1@3452.07,2026.33 cw(c3443.38,2011) 3461,2011 ; 3459.37,2009.37 ccw(c3426.67,2042.06) R220.1@3472.91,2042.06 ; 3459.37,2009.37 ccw(c3426.67,2042.06) R220.1@3472.91,2042.06 ; 3459.37,2009.37 ccw(c3426.67,2042.06) R220.1@3472.91,2042.06 ; 3461,2011 cw(c3478.62,2011) R220.1@3469.93,2026.33 ; 3461,2011 cw(c3478.62,2011) R220.1@3469.93,2026.33 ; 3461,2011 cw(c3478.62,2011) R220.1@3469.93,2026.33 ; R220.1@3461,2068.03 ccw(c3461,2121.21) 3498.6,2083.6 ; R220.1@3461,2068.03 ccw(c3461,2121.21) 3498.6,2083.6 ; R220.1@3461,2068.03 ccw(c3461,2121.21) 3498.6,2083.6 ; R220.1@3479.09,2049.94 cw(c3513.26,2049.94) 3489.1,2074.1 ; R220.1@3479.09,2049.94 cw(c3513.26,2049.94) 3489.1,2074.1 ; R220.1@3479.09,2049.94 cw(c3513.26,2049.94) 3489.1,2074.1 ; C24.2@3378.02,1836.73 ccw(c3355.87,1858.88) 3387.2,1858.88 cw(c3355.87,1858.88) C24.2@3378.02,1836.73 ; 3387.2,1876.35 ccw(c3443.22,1876.35) 3403.61,1836.73 cw(c3443.22,1876.35) 3387.2,1876.35
NetC102_1: C102.1 U1.1 | length 442.8
  Top Layer w10: v1@390.63,2899.37 U1.1@519.29,2899.37 ; v1@391.77,2901.77 ccw(c397.56,2907.56) 397.56,2899.37 ; v1@391.77,2901.77 ccw(c397.56,2907.56) 397.56,2899.37 ; v1@391.77,2901.77 ccw(c397.56,2907.56) 397.56,2899.37
  Top Layer w15: v1(390,2900) v1@390.63,2899.37
  Bottom Layer w15: v1(390,2900) 390,2705 v2(460,2635)
NetC103_1: C103.1 C104.1 U1.3 | length 951.1
  Top Layer w10: v1(255,2865) 260,2860 U1.3@519.29,2860
  Top Layer w20: C104.1@257.4,2540 C103.1@257.4,2640 ; C104.1@246.38,2554.96 ccw(c219.76,2581.58) 257.4,2581.58 ; C104.1@246.38,2554.96 ccw(c219.76,2581.58) 257.4,2581.58 ; C104.1@246.38,2554.96 ccw(c219.76,2581.58) 257.4,2581.58 ; C103.1@246.38,2625.04 cw(c219.76,2598.42) 257.4,2598.42 ; C103.1@246.38,2625.04 cw(c219.76,2598.42) 257.4,2598.42 ; C103.1@246.38,2625.04 cw(c219.76,2598.42) 257.4,2598.42 ; 257.4,2581.58 ccw(c295.04,2581.58) C104.1@268.43,2554.96 ; 257.4,2581.58 ccw(c295.04,2581.58) C104.1@268.43,2554.96 ; 257.4,2581.58 ccw(c295.04,2581.58) C104.1@268.43,2554.96 ; 257.4,2598.42 cw(c295.04,2598.42) C103.1@268.43,2625.04 ; 257.4,2598.42 cw(c295.04,2598.42) C103.1@268.43,2625.04 ; 257.4,2598.42 cw(c295.04,2598.42) C103.1@268.43,2625.04
  Bottom Layer w15: v2(255,2635) v1(255,2865)